# Altium PCB PCB1.PcbDoc (part 2 of 2)
Units mm, origin at the board's own origin, x right, y up, seen from the top; angles counter-clockwise.
Board outline 101 x 100.58 mm, 2 copper layers (Top Layer, Bottom Layer); 195 components, 8 nets, 449 pads, 0 vias.
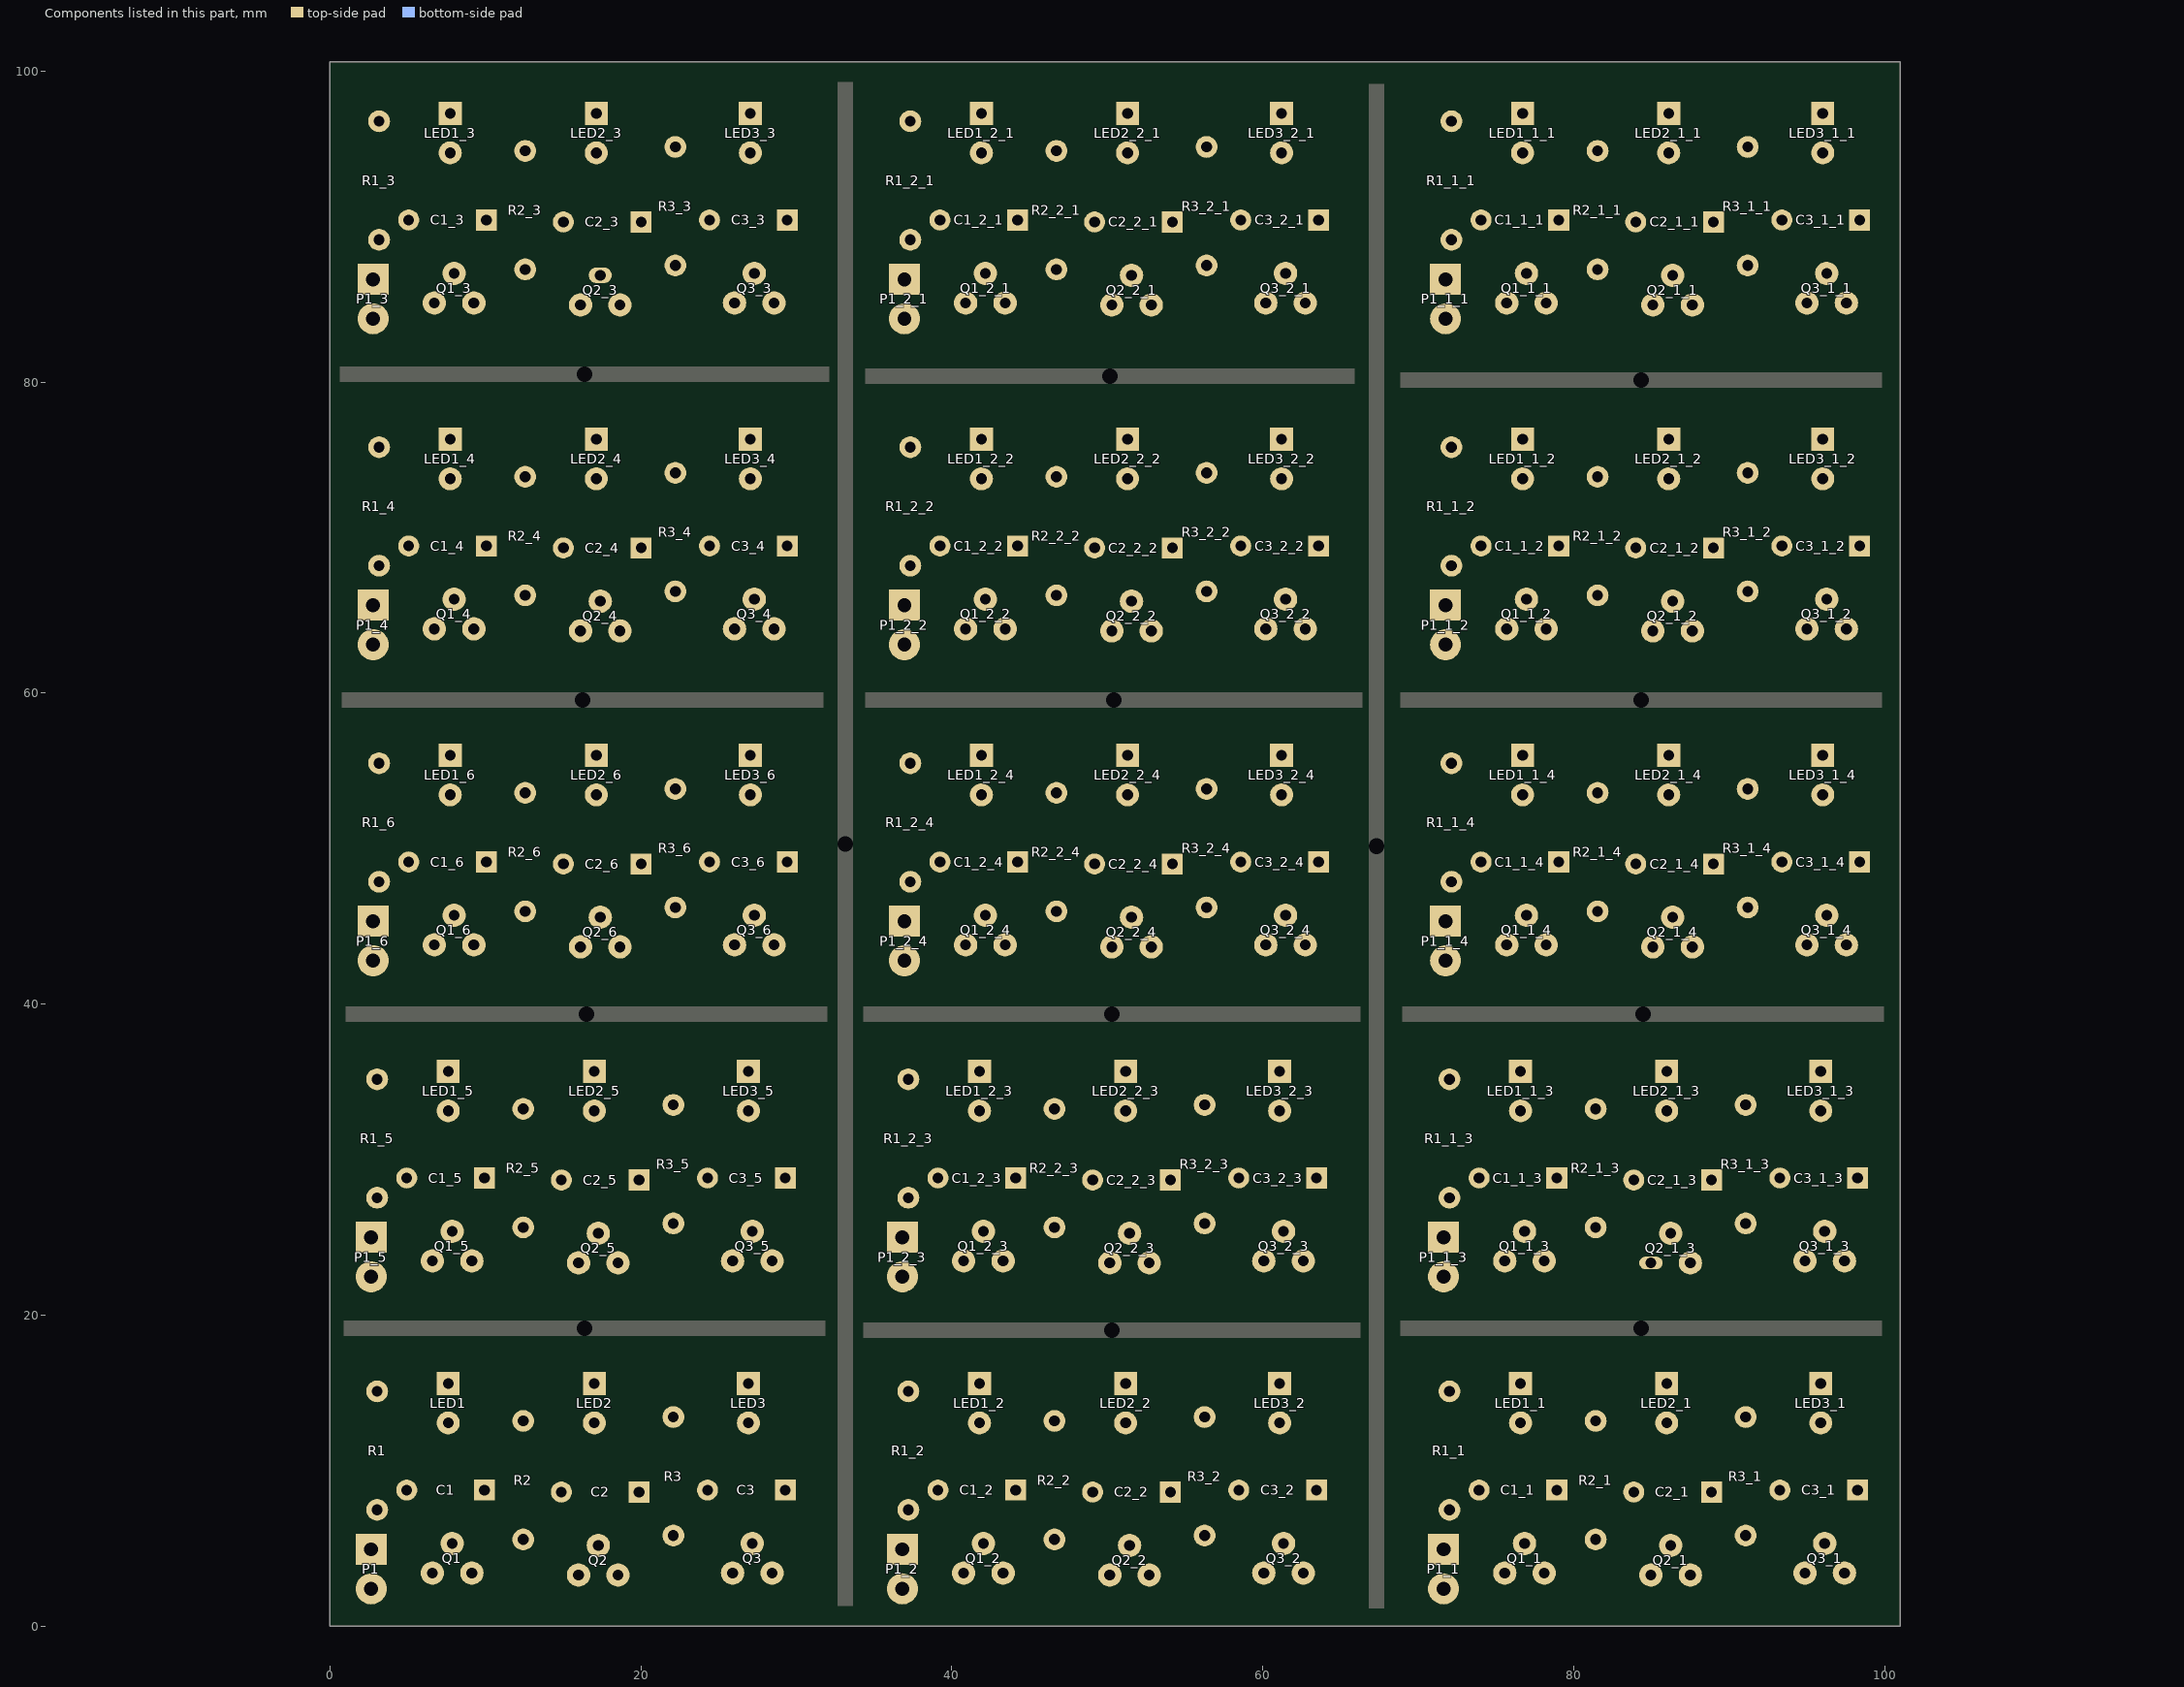
[diagram p2: the components of this part, seen from the top]

## Nets (pads, with @x,y where several pads share a name; then routed paths per layer and width w, separated by ;. In a path a pad name is that pad's centre, name@x,y a point inside that pad or via, vN(x,y) a via of type N, cw(c..) or ccw(c..) an arc to the next point about the centre after c; other vN are vias at no path point) (continued)
copper on no net: | length 2367.1
  Top Layer w0.762: 9.136,23.495 10.152,24.511 10.152,25.527 8.16,27.519 3.04,27.519 3.04,27.559 3.04,29.972 3.802,30.734 27.384,30.734 29.289,28.829 ; 9.263,43.815 10.279,44.831 10.279,45.847 8.287,47.839 3.167,47.839 3.167,47.879 3.167,50.292 3.929,51.054 27.511,51.054 29.416,49.149 ; 9.263,64.135 10.279,65.151 10.279,66.167 8.287,68.159 3.167,68.159 3.167,68.199 3.167,70.612 3.929,71.374 27.511,71.374 29.416,69.469 ; 9.263,85.09 10.279,86.106 10.279,87.122 8.287,89.114 3.167,89.114 3.167,89.154 3.167,91.567 3.929,92.329 27.511,92.329 29.416,90.424 ; 12.438,25.654 13.581,26.797 18.28,26.797 19.677,25.4 19.677,24.511 18.534,23.368 ; 12.565,45.974 13.708,47.117 18.407,47.117 19.804,45.72 19.804,44.831 18.661,43.688 ; 12.565,66.294 13.708,67.437 18.407,67.437 19.804,66.04 19.804,65.151 18.661,64.008 ; 12.565,87.249 13.708,88.392 18.407,88.392 19.804,86.995 19.804,86.106 18.661,84.963 ; 22.09,25.908 23.106,26.924 28.567,26.924 29.456,26.035 29.456,24.511 28.44,23.495 ; 22.217,46.228 23.233,47.244 28.694,47.244 29.583,46.355 29.583,44.831 28.567,43.815 ; 22.217,66.548 23.233,67.564 28.694,67.564 29.583,66.675 29.583,65.151 28.567,64.135 ; 22.217,87.503 23.233,88.519 28.694,88.519 29.583,87.63 29.583,86.106 28.567,85.09 ; 43.299,3.429 44.315,4.445 44.315,5.461 42.323,7.453 37.203,7.453 37.203,7.493 37.203,9.906 37.965,10.668 61.547,10.668 63.452,8.763 ; 43.299,23.495 44.315,24.511 44.315,25.527 42.323,27.519 37.203,27.519 37.203,27.559 37.203,29.972 37.965,30.734 61.547,30.734 63.452,28.829 ; 43.426,43.815 44.442,44.831 44.442,45.847 42.45,47.839 37.33,47.839 37.33,47.879 37.33,50.292 38.092,51.054 61.674,51.054 63.579,49.149 ; 43.426,64.135 44.442,65.151 44.442,66.167 42.45,68.159 37.33,68.159 37.33,68.199 37.33,70.612 38.092,71.374 61.674,71.374 63.579,69.469 ; 43.426,85.09 44.442,86.106 44.442,87.122 42.45,89.114 37.33,89.114 37.33,89.154 37.33,91.567 38.092,92.329 61.674,92.329 63.579,90.424 ; 46.601,5.588 47.744,6.731 52.443,6.731 53.84,5.334 53.84,4.445 52.697,3.302 ; 46.601,25.654 47.744,26.797 52.443,26.797 53.84,25.4 53.84,24.511 52.697,23.368 ; 46.728,45.974 47.871,47.117 52.57,47.117 53.967,45.72 53.967,44.831 52.824,43.688 ; 46.728,66.294 47.871,67.437 52.57,67.437 53.967,66.04 53.967,65.151 52.824,64.008 ; 46.728,87.249 47.871,88.392 52.57,88.392 53.967,86.995 53.967,86.106 52.824,84.963 ; 56.253,5.842 57.269,6.858 62.73,6.858 63.619,5.969 63.619,4.445 62.603,3.429 ; 56.253,25.908 57.269,26.924 62.73,26.924 63.619,26.035 63.619,24.511 62.603,23.495 ; 56.38,46.228 57.396,47.244 62.857,47.244 63.746,46.355 63.746,44.831 62.73,43.815 ; 56.38,66.548 57.396,67.564 62.857,67.564 63.746,66.675 63.746,65.151 62.73,64.135 ; 56.38,87.503 57.396,88.519 62.857,88.519 63.746,87.63 63.746,86.106 62.73,85.09 ; 78.097,3.429 79.113,4.445 79.113,5.461 77.121,7.453 72.001,7.453 72.001,7.493 72.001,9.906 72.763,10.668 96.345,10.668 98.25,8.763 ; 78.097,23.495 79.113,24.511 79.113,25.527 77.121,27.519 72.001,27.519 72.001,27.559 72.001,29.972 72.763,30.734 96.345,30.734 98.25,28.829 ; 78.224,43.815 79.24,44.831 79.24,45.847 77.248,47.839 72.128,47.839 72.128,47.879 72.128,50.292 72.89,51.054 96.472,51.054 98.377,49.149 ; 78.224,64.135 79.24,65.151 79.24,66.167 77.248,68.159 72.128,68.159 72.128,68.199 72.128,70.612 72.89,71.374 96.472,71.374 98.377,69.469 ; 78.224,85.09 79.24,86.106 79.24,87.122 77.248,89.114 72.128,89.114 72.128,89.154 72.128,91.567 72.89,92.329 96.472,92.329 98.377,90.424 ; 81.399,5.588 82.542,6.731 87.241,6.731 88.638,5.334 88.638,4.445 87.495,3.302 ; 81.399,25.654 82.542,26.797 87.241,26.797 88.638,25.4 88.638,24.511 87.495,23.368 ; 81.526,45.974 82.669,47.117 87.368,47.117 88.765,45.72 88.765,44.831 87.622,43.688 ; 81.526,66.294 82.669,67.437 87.368,67.437 88.765,66.04 88.765,65.151 87.622,64.008 ; 81.526,87.249 82.669,88.392 87.368,88.392 88.765,86.995 88.765,86.106 87.622,84.963 ; 91.051,5.842 92.067,6.858 97.528,6.858 98.417,5.969 98.417,4.445 97.401,3.429 ; 91.051,25.908 92.067,26.924 97.528,26.924 98.417,26.035 98.417,24.511 97.401,23.495 ; 91.178,46.228 92.194,47.244 97.655,47.244 98.544,46.355 98.544,44.831 97.528,43.815 ; 91.178,66.548 92.194,67.564 97.655,67.564 98.544,66.675 98.544,65.151 97.528,64.135 ; 91.178,87.503 92.194,88.519 97.655,88.519 98.544,87.63 98.544,86.106 97.528,85.09
  Bottom Layer w0.762: 2.659,22.479 3.675,21.463 4.564,21.463 ; 2.659,25.019 1.643,26.035 1.643,28.702 3.04,30.099 3.04,35.179 7.104,35.179 7.612,35.687 10.025,35.687 12.438,33.274 14.597,33.274 17.01,35.687 19.931,35.687 22.09,33.528 24.757,33.528 26.916,35.687 ; 2.786,42.799 3.802,41.783 4.691,41.783 ; 2.786,45.339 1.77,46.355 1.77,49.022 3.167,50.419 3.167,55.499 7.231,55.499 7.739,56.007 10.152,56.007 12.565,53.594 14.724,53.594 17.137,56.007 20.058,56.007 22.217,53.848 24.884,53.848 27.043,56.007 ; 2.786,63.119 3.802,62.103 4.691,62.103 ; 2.786,65.659 1.77,66.675 1.77,69.342 3.167,70.739 3.167,75.819 7.231,75.819 7.739,76.327 10.152,76.327 12.565,73.914 14.724,73.914 17.137,76.327 20.058,76.327 22.217,74.168 24.884,74.168 27.043,76.327 ; 2.786,84.074 3.802,83.058 4.691,83.058 ; 2.786,86.614 1.77,87.63 1.77,90.297 3.167,91.694 3.167,96.774 7.231,96.774 7.739,97.282 10.152,97.282 12.565,94.869 14.724,94.869 17.137,97.282 20.058,97.282 22.217,95.123 24.884,95.123 27.043,97.282 ; 6.596,23.495 4.564,21.463 ; 6.723,43.815 4.691,41.783 ; 6.723,64.135 4.691,62.103 ; 6.723,85.09 4.691,83.058 ; 7.612,33.147 7.612,31.496 4.945,28.829 7.866,25.908 7.866,25.4 ; 7.739,53.467 7.739,51.816 5.072,49.149 7.993,46.228 7.993,45.72 ; 7.739,73.787 7.739,72.136 5.072,69.469 7.993,66.548 7.993,66.04 ; 7.739,94.742 7.739,93.091 5.072,90.424 7.993,87.503 7.993,86.995 ; 9.945,28.829 9.945,28.147 12.438,25.654 ; 10.072,49.149 10.072,48.467 12.565,45.974 ; 10.072,69.469 10.072,68.787 12.565,66.294 ; 10.072,90.424 10.072,89.742 12.565,87.249 ; 15.994,23.368 15.867,23.368 13.962,21.463 ; 16.121,43.688 15.994,43.688 14.089,41.783 ; 16.121,64.008 15.994,64.008 14.089,62.103 ; 16.121,84.963 15.994,84.963 14.089,83.058 ; 17.01,33.147 17.01,30.821 14.891,28.702 17.264,26.329 17.264,25.273 ; 17.137,53.467 17.137,51.141 15.018,49.022 17.391,46.649 17.391,45.593 ; 17.137,73.787 17.137,71.461 15.018,69.342 17.391,66.969 17.391,65.913 ; 17.137,94.742 17.137,92.416 15.018,90.297 17.391,87.924 17.391,86.868 ; 19.891,28.702 22.09,26.503 22.09,25.908 ; 20.018,49.022 22.217,46.823 22.217,46.228 ; 20.018,69.342 22.217,67.143 22.217,66.548 ; 20.018,90.297 22.217,88.098 22.217,87.503 ; 25.9,23.495 23.868,21.463 13.962,21.463 ; 26.027,43.815 23.995,41.783 14.089,41.783 ; 26.027,64.135 23.995,62.103 14.089,62.103 ; 26.027,85.09 23.995,83.058 14.089,83.058 ; 26.916,33.147 26.916,31.456 24.289,28.829 27.17,25.948 27.17,25.4 ; 27.043,53.467 27.043,51.776 24.416,49.149 27.297,46.268 27.297,45.72 ; 27.043,73.787 27.043,72.096 24.416,69.469 27.297,66.588 27.297,66.04 ; 27.043,94.742 27.043,93.051 24.416,90.424 27.297,87.543 27.297,86.995 ; 36.822,2.413 37.838,1.397 38.727,1.397 ; 36.822,4.953 35.806,5.969 35.806,8.636 37.203,10.033 37.203,15.113 41.267,15.113 41.775,15.621 44.188,15.621 46.601,13.208 48.76,13.208 51.173,15.621 54.094,15.621 56.253,13.462 58.92,13.462 61.079,15.621 ; 36.822,22.479 37.838,21.463 38.727,21.463 ; 36.822,25.019 35.806,26.035 35.806,28.702 37.203,30.099 37.203,35.179 41.267,35.179 41.775,35.687 44.188,35.687 46.601,33.274 48.76,33.274 51.173,35.687 54.094,35.687 56.253,33.528 58.92,33.528 61.079,35.687 ; 36.949,42.799 37.965,41.783 38.854,41.783 ; 36.949,45.339 35.933,46.355 35.933,49.022 37.33,50.419 37.33,55.499 41.394,55.499 41.902,56.007 44.315,56.007 46.728,53.594 48.887,53.594 51.3,56.007 54.221,56.007 56.38,53.848 59.047,53.848 61.206,56.007 ; 36.949,63.119 37.965,62.103 38.854,62.103 ; 36.949,65.659 35.933,66.675 35.933,69.342 37.33,70.739 37.33,75.819 41.394,75.819 41.902,76.327 44.315,76.327 46.728,73.914 48.887,73.914 51.3,76.327 54.221,76.327 56.38,74.168 59.047,74.168 61.206,76.327 ; 36.949,84.074 37.965,83.058 38.854,83.058 ; 36.949,86.614 35.933,87.63 35.933,90.297 37.33,91.694 37.33,96.774 41.394,96.774 41.902,97.282 44.315,97.282 46.728,94.869 48.887,94.869 51.3,97.282 54.221,97.282 56.38,95.123 59.047,95.123 61.206,97.282 ; 40.759,3.429 38.727,1.397 ; 40.759,23.495 38.727,21.463 ; 40.886,43.815 38.854,41.783 ; 40.886,64.135 38.854,62.103 ; 40.886,85.09 38.854,83.058 ; 41.775,13.081 41.775,11.43 39.108,8.763 42.029,5.842 42.029,5.334 ; 41.775,33.147 41.775,31.496 39.108,28.829 42.029,25.908 42.029,25.4 ; 41.902,53.467 41.902,51.816 39.235,49.149 42.156,46.228 42.156,45.72 ; 41.902,73.787 41.902,72.136 39.235,69.469 42.156,66.548 42.156,66.04 ; 41.902,94.742 41.902,93.091 39.235,90.424 42.156,87.503 42.156,86.995 ; 44.108,8.763 44.108,8.081 46.601,5.588 ; 44.108,28.829 44.108,28.147 46.601,25.654 ; 44.235,49.149 44.235,48.467 46.728,45.974 ; 44.235,69.469 44.235,68.787 46.728,66.294 ; 44.235,90.424 44.235,89.742 46.728,87.249 ; 50.157,3.302 50.03,3.302 48.125,1.397 ; 50.157,23.368 50.03,23.368 48.125,21.463 ; 50.284,43.688 50.157,43.688 48.252,41.783 ; 50.284,64.008 50.157,64.008 48.252,62.103 ; 50.284,84.963 50.157,84.963 48.252,83.058 ; 51.173,13.081 51.173,10.755 49.054,8.636 51.427,6.263 51.427,5.207 ; 51.173,33.147 51.173,30.821 49.054,28.702 51.427,26.329 51.427,25.273 ; 51.3,53.467 51.3,51.141 49.181,49.022 51.554,46.649 51.554,45.593 ; 51.3,73.787 51.3,71.461 49.181,69.342 51.554,66.969 51.554,65.913 ; 51.3,94.742 51.3,92.416 49.181,90.297 51.554,87.924 51.554,86.868 ; 54.054,8.636 56.253,6.437 56.253,5.842 ; 54.054,28.702 56.253,26.503 56.253,25.908 ; 54.181,49.022 56.38,46.823 56.38,46.228 ; 54.181,69.342 56.38,67.143 56.38,66.548 ; 54.181,90.297 56.38,88.098 56.38,87.503 ; 60.063,3.429 58.031,1.397 48.125,1.397 ; 60.063,23.495 58.031,21.463 48.125,21.463 ; 60.19,43.815 58.158,41.783 48.252,41.783 ; 60.19,64.135 58.158,62.103 48.252,62.103 ; 60.19,85.09 58.158,83.058 48.252,83.058 ; 61.079,13.081 61.079,11.39 58.452,8.763 61.333,5.882 61.333,5.334 ; 61.079,33.147 61.079,31.456 58.452,28.829 61.333,25.948 61.333,25.4 ; 61.206,53.467 61.206,51.776 58.579,49.149 61.46,46.268 61.46,45.72 ; 61.206,73.787 61.206,72.096 58.579,69.469 61.46,66.588 61.46,66.04 ; 61.206,94.742 61.206,93.051 58.579,90.424 61.46,87.543 61.46,86.995 ; 71.62,2.413 72.636,1.397 73.525,1.397 ; 71.62,4.953 70.604,5.969 70.604,8.636 72.001,10.033 72.001,15.113 76.065,15.113 76.573,15.621 78.986,15.621 81.399,13.208 83.558,13.208 85.971,15.621 88.892,15.621 91.051,13.462 93.718,13.462 95.877,15.621 ; 71.62,22.479 72.636,21.463 73.525,21.463 ; 71.62,25.019 70.604,26.035 70.604,28.702 72.001,30.099 72.001,35.179 76.065,35.179 76.573,35.687 78.986,35.687 81.399,33.274 83.558,33.274 85.971,35.687 88.892,35.687 91.051,33.528 93.718,33.528 95.877,35.687 ; 71.747,42.799 72.763,41.783 73.652,41.783 ; 71.747,45.339 70.731,46.355 70.731,49.022 72.128,50.419 72.128,55.499 76.192,55.499 76.7,56.007 79.113,56.007 81.526,53.594 83.685,53.594 86.098,56.007 89.019,56.007 91.178,53.848 93.845,53.848 96.004,56.007 ; 71.747,63.119 72.763,62.103 73.652,62.103 ; 71.747,65.659 70.731,66.675 70.731,69.342 72.128,70.739 72.128,75.819 76.192,75.819 76.7,76.327 79.113,76.327 81.526,73.914 83.685,73.914 86.098,76.327 89.019,76.327 91.178,74.168 93.845,74.168 96.004,76.327 ; 71.747,84.074 72.763,83.058 73.652,83.058 ; 71.747,86.614 70.731,87.63 70.731,90.297 72.128,91.694 72.128,96.774 76.192,96.774 76.7,97.282 79.113,97.282 81.526,94.869 83.685,94.869 86.098,97.282 89.019,97.282 91.178,95.123 93.845,95.123 96.004,97.282 ; 75.557,3.429 73.525,1.397 ; 75.557,23.495 73.525,21.463 ; 75.684,43.815 73.652,41.783 ; 75.684,64.135 73.652,62.103 ; 75.684,85.09 73.652,83.058 ; 76.573,13.081 76.573,11.43 73.906,8.763 76.827,5.842 76.827,5.334 ; 76.573,33.147 76.573,31.496 73.906,28.829 76.827,25.908 76.827,25.4 ; 76.7,53.467 76.7,51.816 74.033,49.149 76.954,46.228 76.954,45.72 ; 76.7,73.787 76.7,72.136 74.033,69.469 76.954,66.548 76.954,66.04 ; 76.7,94.742 76.7,93.091 74.033,90.424 76.954,87.503 76.954,86.995 ; 78.906,8.763 78.906,8.081 81.399,5.588 ; 78.906,28.829 78.906,28.147 81.399,25.654 ; 79.033,49.149 79.033,48.467 81.526,45.974 ; 79.033,69.469 79.033,68.787 81.526,66.294 ; 79.033,90.424 79.033,89.742 81.526,87.249 ; 84.955,3.302 84.828,3.302 82.923,1.397 ; 84.955,23.368 84.828,23.368 82.923,21.463 ; 85.082,43.688 84.955,43.688 83.05,41.783 ; 85.082,64.008 84.955,64.008 83.05,62.103 ; 85.082,84.963 84.955,84.963 83.05,83.058 ; 85.971,13.081 85.971,10.755 83.852,8.636 86.225,6.263 86.225,5.207 ; 85.971,33.147 85.971,30.821 83.852,28.702 86.225,26.329 86.225,25.273 ; 86.098,53.467 86.098,51.141 83.979,49.022 86.352,46.649 86.352,45.593 ; 86.098,73.787 86.098,71.461 83.979,69.342 86.352,66.969 86.352,65.913 ; 86.098,94.742 86.098,92.416 83.979,90.297 86.352,87.924 86.352,86.868 ; 88.852,8.636 91.051,6.437 91.051,5.842 ; 88.852,28.702 91.051,26.503 91.051,25.908 ; 88.979,49.022 91.178,46.823 91.178,46.228 ; 88.979,69.342 91.178,67.143 91.178,66.548 ; 88.979,90.297 91.178,88.098 91.178,87.503 ; 94.861,3.429 92.829,1.397 82.923,1.397 ; 94.861,23.495 92.829,21.463 82.923,21.463 ; 94.988,43.815 92.956,41.783 83.05,41.783 ; 94.988,64.135 92.956,62.103 83.05,62.103 ; 94.988,85.09 92.956,83.058 83.05,83.058 ; 95.877,13.081 95.877,11.39 93.25,8.763 96.131,5.882 96.131,5.334 ; 95.877,33.147 95.877,31.456 93.25,28.829 96.131,25.948 96.131,25.4 ; 96.004,53.467 96.004,51.776 93.377,49.149 96.258,46.268 96.258,45.72 ; 96.004,73.787 96.004,72.096 93.377,69.469 96.258,66.588 96.258,66.04 ; 96.004,94.742 96.004,93.051 93.377,90.424 96.258,87.543 96.258,86.995 ; 4.564,21.463 13.962,21.463 ; 4.691,41.783 14.089,41.783 ; 4.691,62.103 14.089,62.103 ; 4.691,83.058 14.089,83.058 ; 38.727,1.397 48.125,1.397 ; 38.727,21.463 48.125,21.463 ; 38.854,41.783 48.252,41.783 ; 38.854,62.103 48.252,62.103 ; 38.854,83.058 48.252,83.058 ; 73.525,1.397 82.923,1.397 ; 73.525,21.463 82.923,21.463 ; 73.652,41.783 83.05,41.783 ; 73.652,62.103 83.05,62.103 ; 73.652,83.058 83.05,83.058

## Keep-outs
Keep-Out Layer:
  lines w0.254: 0.254,0.127 100.838,0.127 100.838,100.076 0.254,100.076 0.254,0.254 0.254,0.127

## Silkscreen, mask and mechanical layers (free items; w line width, h text height)
Top Overlay:
  lines w0.254: 0.881,0.635 0.881,18.034 31.107,18.034 31.107,0.635 0.881,0.635 ; 0.881,20.701 31.107,20.701 31.107,38.1 0.881,38.1 0.881,20.701 ; 1.008,41.021 31.234,41.021 31.234,58.42 1.008,58.42 1.008,41.021 ; 1.008,61.341 31.234,61.341 31.234,78.74 1.008,78.74 1.008,61.341 ; 1.008,82.296 31.234,82.296 31.234,99.695 1.008,99.695 1.008,82.296 ; 35.044,0.635 65.27,0.635 65.27,18.034 35.044,18.034 35.044,0.635 ; 35.044,20.701 35.044,38.1 65.27,38.1 65.27,20.701 35.044,20.701 ; 35.171,41.021 35.171,58.42 65.397,58.42 65.397,41.021 35.171,41.021 ; 35.171,61.341 35.171,78.74 65.397,78.74 65.397,61.341 35.171,61.341 ; 35.171,82.296 35.171,99.695 65.397,99.695 65.397,82.296 35.171,82.296 ; 69.842,0.635 100.068,0.635 100.068,18.034 69.842,18.034 69.842,0.635 ; 69.842,20.701 69.842,38.1 100.068,38.1 100.068,20.701 69.842,20.701 ; 69.969,41.021 69.969,58.42 100.195,58.42 100.195,41.021 69.969,41.021 ; 69.969,61.341 69.969,78.74 100.195,78.74 100.195,61.341 69.969,61.341 ; 69.969,82.296 69.969,99.695 100.195,99.695 100.195,82.296 69.969,82.296
  text "A.I. PCB" at 10.025,98.425 h0.7
  text "A.I. PCB" at 44.188,98.425 h0.7
  text "A.I. PCB" at 78.986,98.425 h0.7
  text "+" at 26.662,98.044 h1
  text "+" at 60.825,98.044 h1
  text "+" at 95.623,98.044 h1
  text "+" at 7.358,97.917 h1
  text "+" at 16.629,97.917 h1
  text "+" at 41.521,97.917 h1
  text "+" at 50.792,97.917 h1
  text "+" at 76.319,97.917 h1
  text "+" at 85.59,97.917 h1
  text "-" at 26.662,95.377 h1
  text "-" at 60.825,95.377 h1
  text "-" at 95.623,95.377 h1
  text "-" at 7.358,95.25 h1
  text "-" at 16.756,95.25 h1
  text "-" at 41.521,95.25 h1
  text "-" at 50.919,95.25 h1
  text "-" at 76.319,95.25 h1
  text "-" at 85.717,95.25 h1
  text "LED" at 15.994,94.996 h1 r90
  text "LED" at 50.157,94.996 h1 r90
  text "LED" at 84.955,94.996 h1 r90
  text "LED" at 6.723,94.869 h1 r90
  text "LED" at 26.027,94.869 h1 r90
  text "LED" at 40.886,94.869 h1 r90
  text "LED" at 60.19,94.869 h1 r90
  text "LED" at 75.684,94.869 h1 r90
  text "LED" at 94.988,94.869 h1 r90
  text "39K" at 3.675,91.821 h1 r90
  text "39K" at 37.838,91.821 h1 r90
  text "39K" at 72.636,91.821 h1 r90
  text "+" at 9.771,91.186 h1
  text "+" at 29.075,91.186 h1
  text "+" at 43.934,91.186 h1
  text "+" at 63.238,91.186 h1
  text "+" at 78.732,91.186 h1
  text "+" at 98.036,91.186 h1
  text "+" at 19.677,91.059 h1
  text "+" at 53.84,91.059 h1
  text "+" at 88.638,91.059 h1
  text "-" at 4.691,90.932 h1
  text "-" at 23.995,90.932 h1
  text "-" at 38.854,90.932 h1
  text "-" at 58.158,90.932 h1
  text "-" at 73.652,90.932 h1
  text "-" at 92.956,90.932 h1
  text "-" at 14.597,90.805 h1
  text "-" at 48.76,90.805 h1
  text "-" at 83.558,90.805 h1
  text "47U" at 25.519,89.916 h1
  text "47U" at 59.682,89.916 h1
  text "47U" at 94.48,89.916 h1
  text "47U" at 6.215,89.789 h1
  text "47U" at 16.121,89.789 h1
  text "39K" at 22.725,89.789 h1 r90
  text "47U" at 40.378,89.789 h1
  text "47U" at 50.284,89.789 h1
  text "39K" at 56.888,89.789 h1 r90
  text "47U" at 75.176,89.789 h1
  text "47U" at 85.082,89.789 h1
  text "39K" at 91.686,89.789 h1 r90
  text "39K" at 13.073,89.662 h1 r90
  text "39K" at 47.236,89.662 h1 r90
  text "39K" at 82.034,89.662 h1 r90
  text "3V" at 3.929,88.9 h2 r270
  text "3V" at 38.092,88.9 h2 r270
  text "3V" at 72.89,88.9 h2 r270
  text "+" at 1.135,87.757 h2
  text "+" at 35.298,87.757 h2
  text "+" at 70.096,87.757 h2
  text "-" at 1.897,84.201 h2
  text "-" at 36.06,84.201 h2
  text "-" at 70.858,84.201 h2
  text "C828" at 46.101,82.804 h0.8
  text "C828" at 56.134,82.804 h0.8
  text "C828" at 81.026,82.804 h0.8
  text "C828" at 90.805,82.804 h0.8
  text "C828" at 12.065,82.677 h0.8
  text "C828" at 21.971,82.677 h0.8
  text "C828" at 6.35,82.55 h0.8
  text "C828" at 40.767,82.55 h0.8
  text "C828" at 75.311,82.55 h0.8
  text "A.I. PCB" at 10.025,77.47 h0.7
  text "A.I. PCB" at 44.188,77.47 h0.7
  text "A.I. PCB" at 78.986,77.47 h0.7
  text "+" at 26.662,77.089 h1
  text "+" at 60.825,77.089 h1
  text "+" at 95.623,77.089 h1
  text "+" at 7.358,76.962 h1
  text "+" at 16.629,76.962 h1
  text "+" at 41.521,76.962 h1
  text "+" at 50.792,76.962 h1
  text "+" at 76.319,76.962 h1
  text "+" at 85.59,76.962 h1
  text "-" at 26.662,74.422 h1
  text "-" at 60.825,74.422 h1
  text "-" at 95.623,74.422 h1
  text "-" at 7.358,74.295 h1
  text "-" at 16.756,74.295 h1
  text "-" at 41.521,74.295 h1
  text "-" at 50.919,74.295 h1
  text "-" at 76.319,74.295 h1
  text "-" at 85.717,74.295 h1
  text "LED" at 15.994,74.041 h1 r90
  text "LED" at 50.157,74.041 h1 r90
  text "LED" at 84.955,74.041 h1 r90
  text "LED" at 6.723,73.914 h1 r90
  text "LED" at 26.027,73.914 h1 r90
  text "LED" at 40.886,73.914 h1 r90
  text "LED" at 60.19,73.914 h1 r90
  text "LED" at 75.684,73.914 h1 r90
  text "LED" at 94.988,73.914 h1 r90
  text "39K" at 3.675,70.866 h1 r90
  text "39K" at 37.838,70.866 h1 r90
  text "39K" at 72.636,70.866 h1 r90
  text "+" at 9.771,70.231 h1
  text "+" at 29.075,70.231 h1
  text "+" at 43.934,70.231 h1
  text "+" at 63.238,70.231 h1
  text "+" at 78.732,70.231 h1
  text "+" at 98.036,70.231 h1
  text "+" at 19.677,70.104 h1
  text "+" at 53.84,70.104 h1
  text "+" at 88.638,70.104 h1
  text "-" at 4.691,69.977 h1
  text "-" at 23.995,69.977 h1
  text "-" at 38.854,69.977 h1
  text "-" at 58.158,69.977 h1
  text "-" at 73.652,69.977 h1
  text "-" at 92.956,69.977 h1
  text "-" at 14.597,69.85 h1
  text "-" at 48.76,69.85 h1
  text "-" at 83.558,69.85 h1
  text "47U" at 25.519,68.961 h1
  text "47U" at 59.682,68.961 h1
  text "47U" at 94.48,68.961 h1
  text "47U" at 6.215,68.834 h1
  text "47U" at 16.121,68.834 h1
  text "39K" at 22.725,68.834 h1 r90
  text "47U" at 40.378,68.834 h1
  text "47U" at 50.284,68.834 h1
  text "39K" at 56.888,68.834 h1 r90
  text "47U" at 75.176,68.834 h1
  text "47U" at 85.082,68.834 h1
  text "39K" at 91.686,68.834 h1 r90
  text "39K" at 13.073,68.707 h1 r90
  text "39K" at 47.236,68.707 h1 r90
  text "39K" at 82.034,68.707 h1 r90
  text "3V" at 3.929,67.945 h2 r270
  text "3V" at 38.092,67.945 h2 r270
  text "3V" at 72.89,67.945 h2 r270
  text "+" at 1.135,66.802 h2
  text "+" at 35.298,66.802 h2
  text "+" at 70.096,66.802 h2
  text "-" at 1.897,63.246 h2
  text "-" at 36.06,63.246 h2
  text "-" at 70.858,63.246 h2
  text "C828" at 21.971,61.849 h0.8
  text "C828" at 56.134,61.849 h0.8
  text "C828" at 80.899,61.849 h0.8
  text "C828" at 90.932,61.849 h0.8
  text "C828" at 12.065,61.722 h0.8
  text "C828" at 46.228,61.722 h0.8
  text "C828" at 6.477,61.595 h0.8
  text "C828" at 40.767,61.595 h0.8
  text "C828" at 75.438,61.595 h0.8
  text "A.I. PCB" at 10.025,57.15 h0.7
  text "A.I. PCB" at 44.188,57.15 h0.7
  text "A.I. PCB" at 78.986,57.15 h0.7
  text "+" at 26.662,56.769 h1
  text "+" at 60.825,56.769 h1
  text "+" at 95.623,56.769 h1
  text "+" at 7.358,56.642 h1
  text "+" at 16.629,56.642 h1
  text "+" at 41.521,56.642 h1
  text "+" at 50.792,56.642 h1
  text "+" at 76.319,56.642 h1
  text "+" at 85.59,56.642 h1
  text "-" at 26.662,54.102 h1
  text "-" at 60.825,54.102 h1
  text "-" at 95.623,54.102 h1
  text "-" at 7.358,53.975 h1
  text "-" at 16.756,53.975 h1
  text "-" at 41.521,53.975 h1
  text "-" at 50.919,53.975 h1
  text "-" at 76.319,53.975 h1
  text "-" at 85.717,53.975 h1
  text "LED" at 15.994,53.721 h1 r90
  text "LED" at 50.157,53.721 h1 r90
  text "LED" at 84.955,53.721 h1 r90
  text "LED" at 6.723,53.594 h1 r90
  text "LED" at 26.027,53.594 h1 r90
  text "LED" at 40.886,53.594 h1 r90
  text "LED" at 60.19,53.594 h1 r90
  text "LED" at 75.684,53.594 h1 r90
  text "LED" at 94.988,53.594 h1 r90
  text "39K" at 3.675,50.546 h1 r90
  text "39K" at 37.838,50.546 h1 r90
  text "39K" at 72.636,50.546 h1 r90
  text "+" at 9.771,49.911 h1
  text "+" at 29.075,49.911 h1
  text "+" at 43.934,49.911 h1
  text "+" at 63.238,49.911 h1
  text "+" at 78.732,49.911 h1
  text "+" at 98.036,49.911 h1
  text "+" at 19.677,49.784 h1
  text "+" at 53.84,49.784 h1
  text "+" at 88.638,49.784 h1
  text "-" at 4.691,49.657 h1
  text "-" at 23.995,49.657 h1
  text "-" at 38.854,49.657 h1
  text "-" at 58.158,49.657 h1
  text "-" at 73.652,49.657 h1
  text "-" at 92.956,49.657 h1
  text "-" at 14.597,49.53 h1
  text "-" at 48.76,49.53 h1
  text "-" at 83.558,49.53 h1
  text "47U" at 25.519,48.641 h1
  text "47U" at 59.682,48.641 h1
  text "47U" at 94.48,48.641 h1
  text "47U" at 6.215,48.514 h1
  text "47U" at 16.121,48.514 h1
  text "39K" at 22.725,48.514 h1 r90
  text "47U" at 40.378,48.514 h1
  text "47U" at 50.284,48.514 h1
  text "39K" at 56.888,48.514 h1 r90
  text "47U" at 75.176,48.514 h1
  text "47U" at 85.082,48.514 h1
  text "39K" at 91.686,48.514 h1 r90
  text "39K" at 13.073,48.387 h1 r90
  text "39K" at 47.236,48.387 h1 r90
  text "39K" at 82.034,48.387 h1 r90
  text "3V" at 3.929,47.625 h2 r270
  text "3V" at 38.092,47.625 h2 r270
  text "3V" at 72.89,47.625 h2 r270
  text "+" at 1.135,46.482 h2
  text "+" at 35.298,46.482 h2
  text "+" at 70.096,46.482 h2
  text "-" at 1.897,42.926 h2
  text "-" at 36.06,42.926 h2
  text "-" at 70.858,42.926 h2
  text "C828" at 56.007,41.656 h0.8
  text "C828" at 21.971,41.529 h0.8
  text "C828" at 46.101,41.529 h0.8
  text "C828" at 90.932,41.529 h0.8
  text "C828" at 12.065,41.402 h0.8
  text "C828" at 80.899,41.402 h0.8
  text "C828" at 6.35,41.275 h0.8
  text "C828" at 40.513,41.275 h0.8
  text "C828" at 75.311,41.275 h0.8
  text "A.I. PCB" at 9.898,36.83 h0.7
  text "A.I. PCB" at 44.061,36.83 h0.7
  text "A.I. PCB" at 78.859,36.83 h0.7
  text "+" at 26.535,36.449 h1
  text "+" at 60.698,36.449 h1
  text "+" at 95.496,36.449 h1
  text "+" at 7.231,36.322 h1
  text "+" at 16.502,36.322 h1
  text "+" at 41.394,36.322 h1
  text "+" at 50.665,36.322 h1
  text "+" at 76.192,36.322 h1
  text "+" at 85.463,36.322 h1
  text "-" at 26.535,33.782 h1
  text "-" at 60.698,33.782 h1
  text "-" at 95.496,33.782 h1
  text "-" at 7.231,33.655 h1
  text "-" at 16.629,33.655 h1
  text "-" at 41.394,33.655 h1
  text "-" at 50.792,33.655 h1
  text "-" at 76.192,33.655 h1
  text "-" at 85.59,33.655 h1
  text "LED" at 15.867,33.401 h1 r90
  text "LED" at 50.03,33.401 h1 r90
  text "LED" at 84.828,33.401 h1 r90
  text "LED" at 6.596,33.274 h1 r90
  text "LED" at 25.9,33.274 h1 r90
  text "LED" at 40.759,33.274 h1 r90
  text "LED" at 60.063,33.274 h1 r90
  text "LED" at 75.557,33.274 h1 r90
  text "LED" at 94.861,33.274 h1 r90
  text "39K" at 3.548,30.226 h1 r90
  text "39K" at 37.711,30.226 h1 r90
  text "39K" at 72.509,30.226 h1 r90
  text "+" at 9.644,29.591 h1
  text "+" at 28.948,29.591 h1
  text "+" at 43.807,29.591 h1
  text "+" at 63.111,29.591 h1
  text "+" at 78.605,29.591 h1
  text "+" at 97.909,29.591 h1
  text "+" at 19.55,29.464 h1
  text "+" at 53.713,29.464 h1
  text "+" at 88.511,29.464 h1
  text "-" at 4.564,29.337 h1
  text "-" at 23.868,29.337 h1
  text "-" at 38.727,29.337 h1
  text "-" at 58.031,29.337 h1
  text "-" at 73.525,29.337 h1
  text "-" at 92.829,29.337 h1
  text "-" at 14.47,29.21 h1
  text "-" at 48.633,29.21 h1
  text "-" at 83.431,29.21 h1
  text "47U" at 25.392,28.321 h1
  text "47U" at 59.555,28.321 h1
  text "47U" at 94.353,28.321 h1
  text "47U" at 6.088,28.194 h1
  text "47U" at 15.994,28.194 h1
  text "39K" at 22.598,28.194 h1 r90
  text "47U" at 40.251,28.194 h1
  text "47U" at 50.157,28.194 h1
  text "39K" at 56.761,28.194 h1 r90
  text "47U" at 75.049,28.194 h1
  text "47U" at 84.955,28.194 h1
  text "39K" at 91.559,28.194 h1 r90
  text "39K" at 12.946,28.067 h1 r90
  text "39K" at 47.109,28.067 h1 r90
  text "39K" at 81.907,28.067 h1 r90
  text "3V" at 3.802,27.305 h2 r270
  text "3V" at 37.965,27.305 h2 r270
  text "3V" at 72.763,27.305 h2 r270
  text "+" at 1.008,26.162 h2
  text "+" at 35.171,26.162 h2
  text "+" at 69.969,26.162 h2
  text "-" at 1.77,22.606 h2
  text "-" at 35.933,22.606 h2
  text "-" at 70.731,22.606 h2
  text "C828" at 90.678,21.336 h0.8
  text "C828" at 11.811,21.209 h0.8
  text "C828" at 21.844,21.209 h0.8
  text "C828" at 45.974,21.209 h0.8
  text "C828" at 56.007,21.209 h0.8
  text "C828" at 80.772,21.209 h0.8
  text "C828" at 6.35,20.955 h0.8
  text "C828" at 40.513,20.955 h0.8
  text "C828" at 75.184,20.955 h0.8
  text "A.I. PCB" at 9.898,16.764 h0.7
  text "A.I. PCB" at 44.061,16.764 h0.7
  text "A.I. PCB" at 78.859,16.764 h0.7
  text "+" at 26.535,16.383 h1
  text "+" at 60.698,16.383 h1
  text "+" at 95.496,16.383 h1
  text "+" at 7.231,16.256 h1
  text "+" at 16.502,16.256 h1
  text "+" at 41.394,16.256 h1
  text "+" at 50.665,16.256 h1
  text "+" at 76.192,16.256 h1
  text "+" at 85.463,16.256 h1
  text "-" at 26.535,13.716 h1
  text "-" at 60.698,13.716 h1
  text "-" at 95.496,13.716 h1
  text "-" at 7.231,13.589 h1
  text "-" at 16.629,13.589 h1
  text "-" at 41.394,13.589 h1
  text "-" at 50.792,13.589 h1
  text "-" at 76.192,13.589 h1
  text "-" at 85.59,13.589 h1
  text "LED" at 15.867,13.335 h1 r90
  text "LED" at 50.03,13.335 h1 r90
  text "LED" at 84.828,13.335 h1 r90
  text "LED" at 6.596,13.208 h1 r90
  text "LED" at 25.9,13.208 h1 r90
  text "LED" at 40.759,13.208 h1 r90
  text "LED" at 60.063,13.208 h1 r90
  text "LED" at 75.557,13.208 h1 r90
  text "LED" at 94.861,13.208 h1 r90
  text "39K" at 3.548,10.16 h1 r90
  text "39K" at 37.711,10.16 h1 r90
  text "39K" at 72.509,10.16 h1 r90
  text "+" at 9.644,9.525 h1
  text "+" at 28.948,9.525 h1
  text "+" at 43.807,9.525 h1
  text "+" at 63.111,9.525 h1
  text "+" at 78.605,9.525 h1
  text "+" at 97.909,9.525 h1
  text "+" at 19.55,9.398 h1
  text "+" at 53.713,9.398 h1
  text "+" at 88.511,9.398 h1
  text "-" at 4.564,9.271 h1
  text "-" at 23.868,9.271 h1
  text "-" at 38.727,9.271 h1
  text "-" at 58.031,9.271 h1
  text "-" at 73.525,9.271 h1
  text "-" at 92.829,9.271 h1
  text "-" at 14.47,9.144 h1
  text "-" at 48.633,9.144 h1
  text "-" at 83.431,9.144 h1
  text "47U" at 25.392,8.255 h1
  text "47U" at 59.555,8.255 h1
  text "47U" at 94.353,8.255 h1
  text "47U" at 6.088,8.128 h1
  text "47U" at 15.994,8.128 h1
  text "39K" at 22.598,8.128 h1 r90
  text "47U" at 40.251,8.128 h1
  text "47U" at 50.157,8.128 h1
  text "39K" at 56.761,8.128 h1 r90
  text "47U" at 75.049,8.128 h1
  text "47U" at 84.955,8.128 h1
  text "39K" at 91.559,8.128 h1 r90
  text "39K" at 12.946,8.001 h1 r90
  text "39K" at 47.109,8.001 h1 r90
  text "39K" at 81.907,8.001 h1 r90
  text "3V" at 3.802,7.239 h2 r270
  text "3V" at 37.965,7.239 h2 r270
  text "3V" at 72.763,7.239 h2 r270
  text "+" at 1.008,6.096 h2
  text "+" at 35.171,6.096 h2
  text "+" at 69.969,6.096 h2
  text "-" at 1.77,2.54 h2
  text "-" at 35.933,2.54 h2
  text "-" at 70.731,2.54 h2
  text "C828" at 55.88,1.27 h0.8
  text "C828" at 21.844,1.143 h0.8
  text "C828" at 90.805,1.143 h0.8
  text "C828" at 11.938,1.016 h0.8
  text "C828" at 46.101,1.016 h0.8
  text "C828" at 80.899,1.016 h0.8
  text "C828" at 6.223,0.889 h0.8
  text "C828" at 40.513,0.889 h0.8
  text "C828" at 75.184,0.889 h0.8
Bottom Overlay:
  text "A.I. PCB" at 23.868,97.155 h2
  text "A.I. PCB" at 58.031,97.155 h2
  text "A.I. PCB" at 92.829,97.155 h2
  text "A.I. PCB" at 23.868,76.2 h2
  text "A.I. PCB" at 58.031,76.2 h2
  text "A.I. PCB" at 92.829,76.2 h2
  text "A.I. PCB" at 23.868,55.88 h2
  text "A.I. PCB" at 58.031,55.88 h2
  text "A.I. PCB" at 92.829,55.88 h2
  text "A.I. PCB" at 23.741,35.56 h2
  text "A.I. PCB" at 57.904,35.56 h2
  text "A.I. PCB" at 92.702,35.56 h2
  text "A.I. PCB" at 23.741,15.494 h2
  text "A.I. PCB" at 57.904,15.494 h2
  text "A.I. PCB" at 92.702,15.494 h2